# Altium PCB floorctrl_power.PcbDoc
Units mm, origin at the board's own origin, x right, y up, seen from the top; angles counter-clockwise.
Board outline 60 x 60 mm, 2 copper layers (Top Layer, Bottom Layer), stack 1.571 mm thick; 43 components, 44 nets, 131 pads, 0 vias.
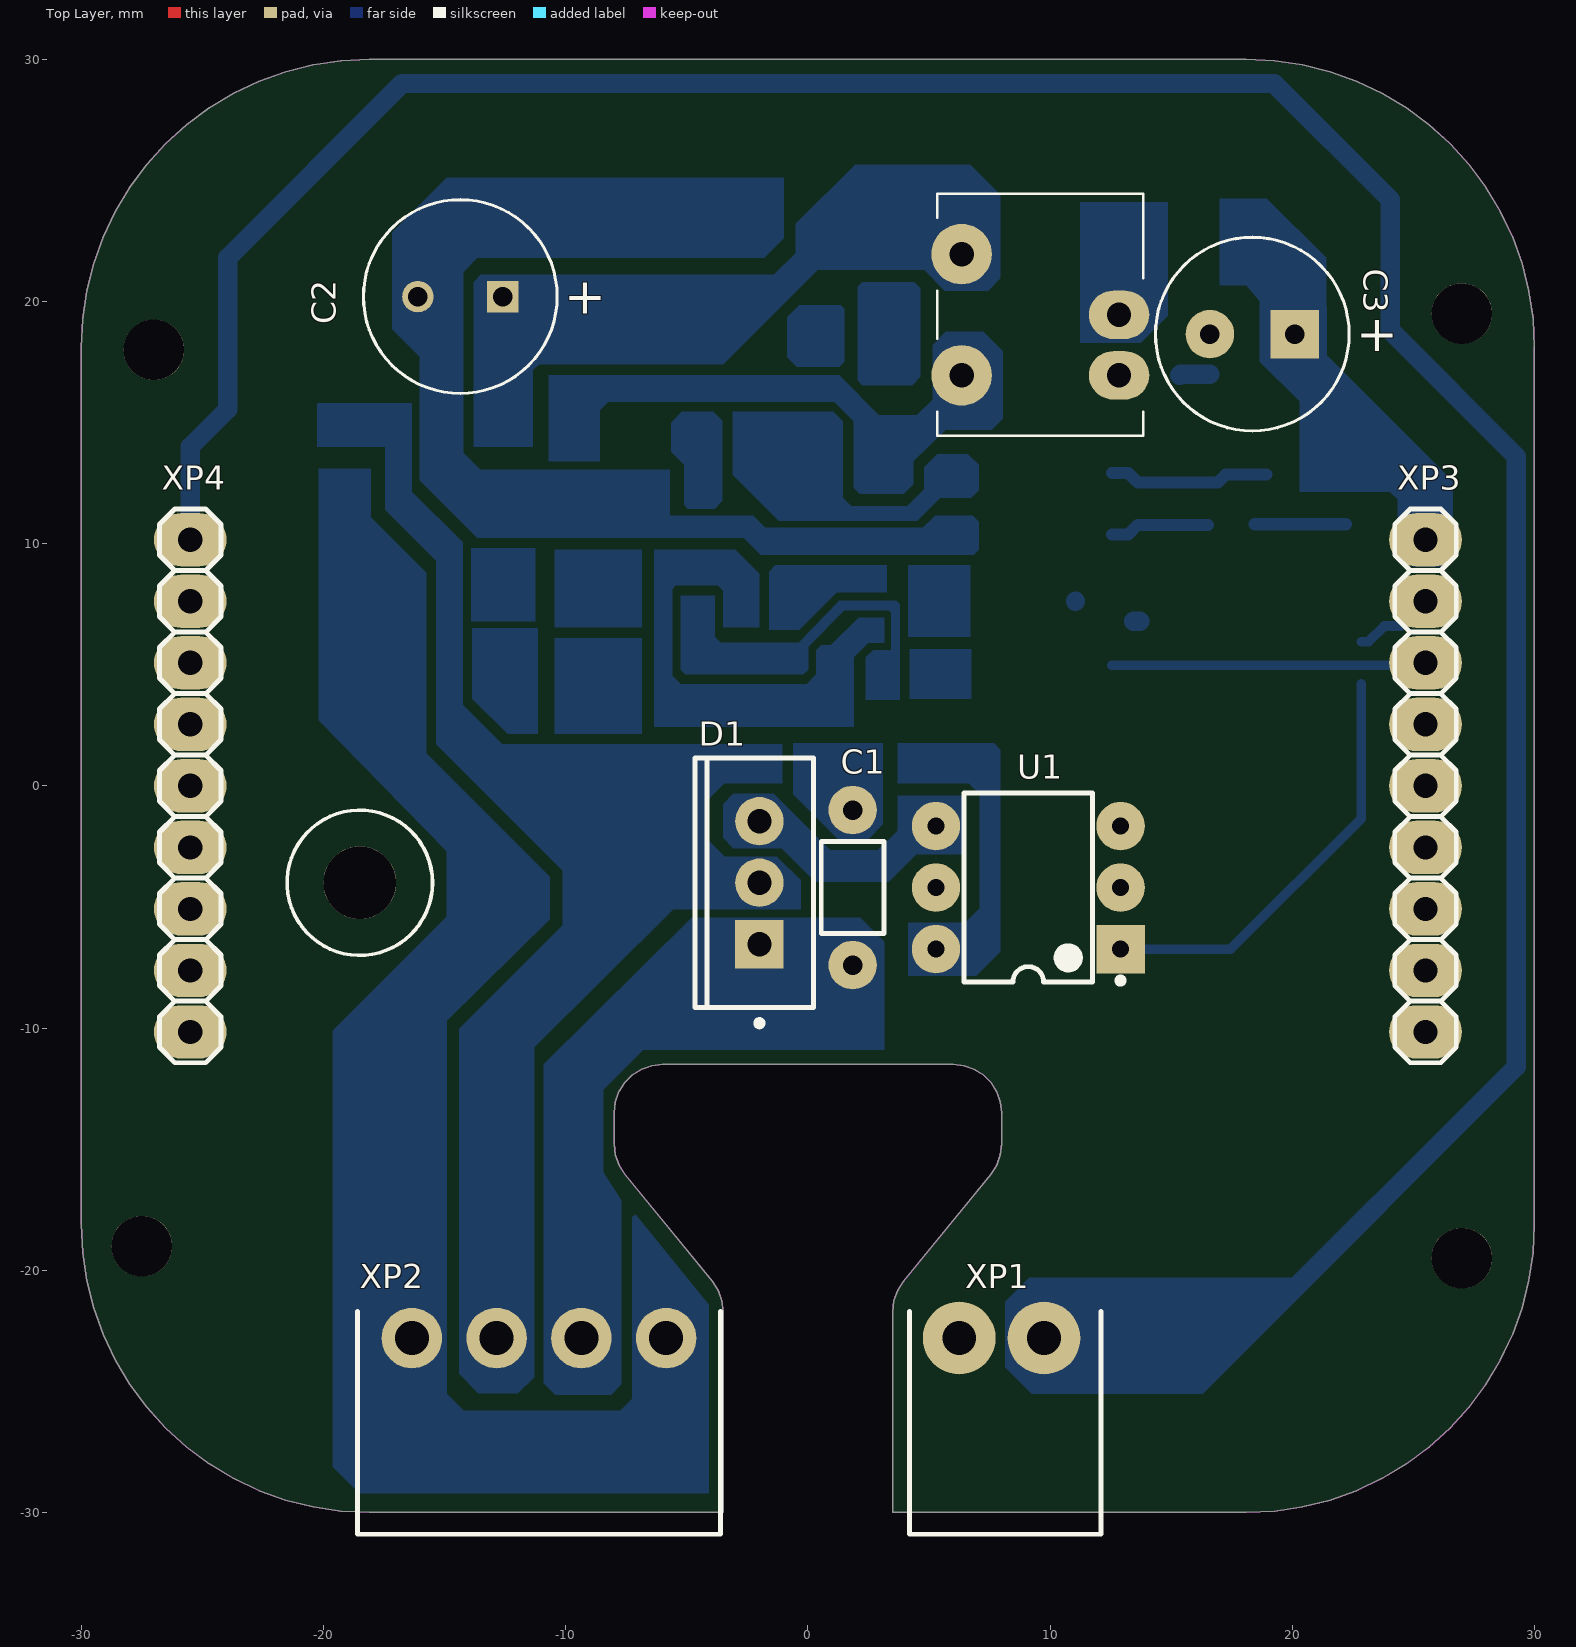
[diagram p0: Top Layer view]
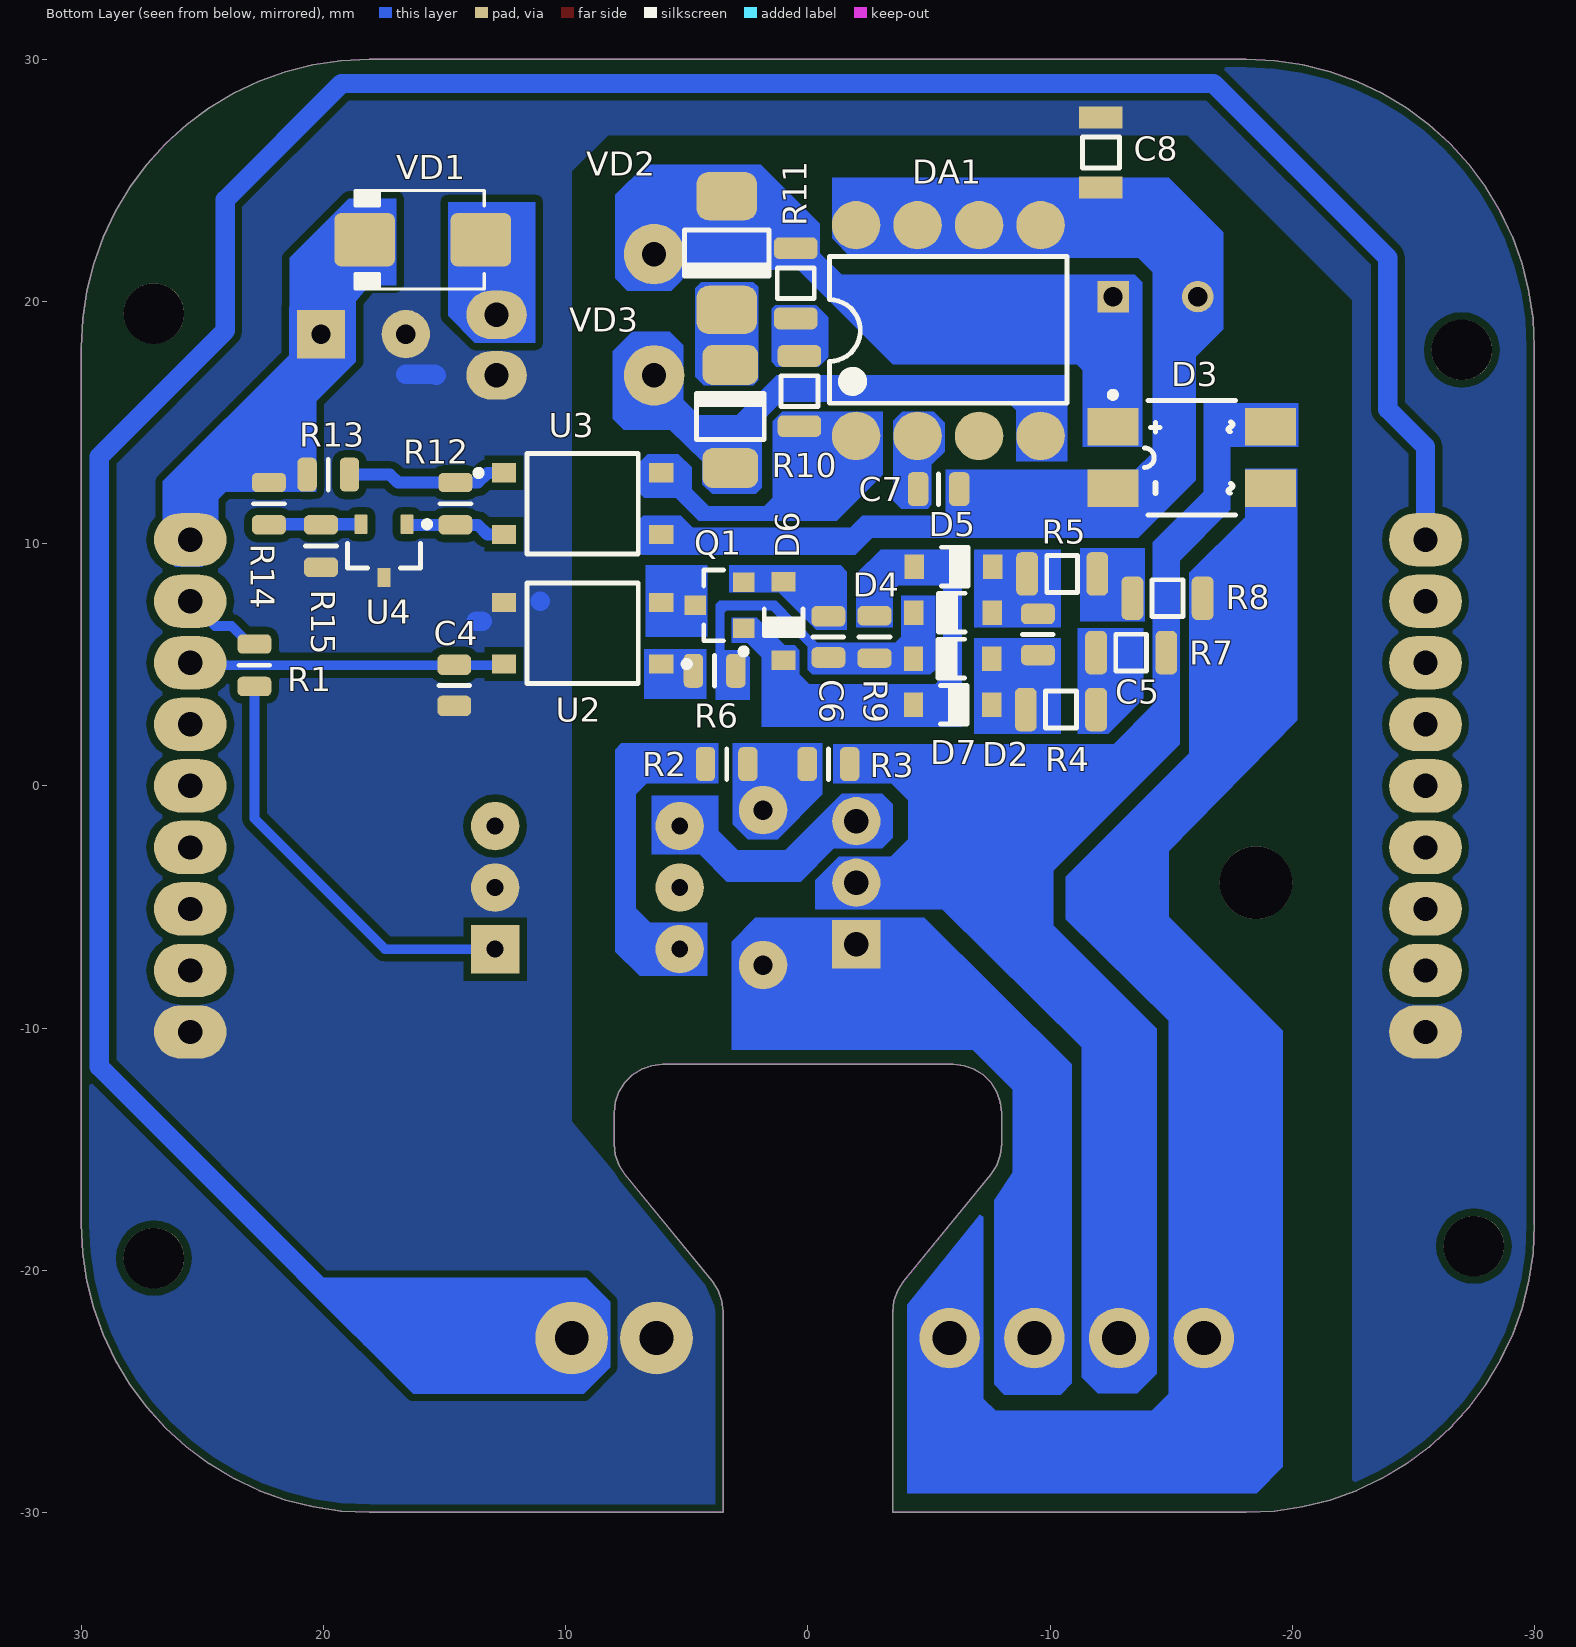
[diagram p1: Bottom Layer view, seen from below]

## Layer stack, top to bottom
Top Solder: solder mask 0.0102, Solder Resist, Dk 3.5
Top Layer: signal copper 0.0356
Dielectric 1: dielectric 1.5, FR-4, Dk 4.8
Bottom Layer: signal copper 0.0356
Bottom Solder: solder mask 0.0102, Solder Resist, Dk 3.5

## Board outline
3.5,-30 3.5,-21.714 3.552,-21.261 3.705,-20.831 3.952,-20.447 7.548,-16.053 7.795,-15.669 7.948,-15.239 8,-14.786 8,-13.5 7.95,-13.055 7.802,-12.632 7.564,-12.253 7.247,-11.936 6.868,-11.698 6.445,-11.55 6,-11.5 -6,-11.5 -6.445,-11.55 -6.868,-11.698 -7.247,-11.936 -7.564,-12.253 -7.802,-12.632 -7.95,-13.055 -8,-13.5 -8,-14.786 -7.948,-15.239 -7.795,-15.669 -7.548,-16.053 -3.952,-20.447 -3.705,-20.831 -3.552,-21.261 -3.5,-21.714 -3.5,-30 -18.107,-30 -19.272,-29.943 -20.427,-29.771 -21.559,-29.488 -22.658,-29.095 -23.713,-28.596 -24.714,-27.996 -25.652,-27.3 -26.517,-26.517 -27.3,-25.652 -27.996,-24.714 -28.596,-23.713 -29.095,-22.658 -29.488,-21.559 -29.771,-20.427 -29.943,-19.272 -30,-18.107 -30,18.107 -29.943,19.272 -29.771,20.427 -29.488,21.559 -29.095,22.658 -28.596,23.713 -27.996,24.714 -27.3,25.652 -26.517,26.516 -25.652,27.3 -24.714,27.996 -23.713,28.596 -22.658,29.095 -21.559,29.488 -20.427,29.771 -19.272,29.943 -18.107,30 18.107,30 19.272,29.943 20.427,29.771 21.559,29.488 22.658,29.095 23.713,28.596 24.714,27.996 25.652,27.3 26.517,26.516 27.3,25.652 27.996,24.714 28.596,23.713 29.095,22.658 29.488,21.559 29.771,20.427 29.943,19.272 30,18.107 30,-18.107 29.943,-19.272 29.771,-20.427 29.488,-21.559 29.095,-22.658 28.596,-23.713 27.996,-24.714 27.3,-25.652 26.517,-26.517 25.652,-27.3 24.714,-27.996 23.713,-28.596 22.658,-29.095 21.559,-29.488 20.427,-29.771 19.272,-29.943 18.107,-30

## Design rules (kind name [scope] priority, off if disabled: settings)
Clearance Clearance_1 [IsRegion] p1: gap=0.3 ignorepadtopadclearanceinfootprint=FALSE
Clearance [All] p2: gap=0.2 ignorepadtopadclearanceinfootprint=FALSE
PlaneConnect [All] p1: planeconnectstyle=Relief reliefexpansion=0.508 reliefentries=4 reliefconductorwidth=0.5 reliefairgap=0.254
PolygonConnect [All] p1: connectstyle=Direct reliefconductorwidth=0.5 reliefentries=4 polygonreliefangle="90 Angle" airgapwidth=0.254
RoutingVias [All] p1: holewidth=0.711 width=1.27 viastyle="Through Hole" minholewidth=0.711 minwidth=1.27 maxholewidth=0.711 maxwidth=1.27
SolderMaskExpansion [All] p1: expansion=0.102
Width [All] p1: maxlimit=2 minlimit=0.2 preferedwidth=0.3
29 further rules are at their usual default settings.

## Components (designator, comment, footprint, x,y, rotation, side; value= is the part's Value field where it differs from the comment)
C1 "A104M15X7RF5TAA" CAPA55-380X260 1.85,-4.2 r90 top
C2 "400 Vdc, 4.7 uF" WCAP-ATG8_8x11.5x3.5#1 -14.35,20.2 r0 top value="4.7 uF"
C3 "10 Vdc, 560 uF" WCAP-ATG8_8x11.5x3.5#2 18.35,18.65 r0 top value="560 uF"
C4 "10nF" CAP0805R 14.6,4.15 r90 bottom
C5 "1nF" CAP0805R -9.5,6.25 r270 bottom
C6 "10uF" CAP0805R -0.85,6.15 r270 bottom
C7 "10uF" CAP0805R -5.4,12.25 r0 bottom
C8 "1nF" CAP1206R -12.1,26.15 r90 bottom
D1 "BTB12-600CW3G" ONSC-TO-220-3-221A-07 -2,-4 r180 top
D2 "1N4148W" JSCJ-SOD-123-2_V -5.98,5.25 r0 bottom
D3 "MB6S" FAIR-MBXS_V -15.85,13.55 r180 bottom
D4 "1N4148W" JSCJ-SOD-123-2_V -6,7.15 r0 bottom
D5 "1N4148W" JSCJ-SOD-123-2_V -6.02,9.05 r180 bottom
D6 "1N4148W" JSCJ-SOD-123-2_V 1,6.8 r270 bottom
D7 "1N4148W" JSCJ-SOD-123-2_V -5.98,3.35 r180 bottom
DA1 "TNY279GN" SMDIP8 -5.8,18.8 r90 bottom
Q1 "BC847BLT3G" ONSC-SOT-23-3-318-08_V 3.65,7.45 r0 bottom
R1 "1k" RES0805R 22.85,4.98 r270 bottom
R2 "330" RES0805R 3.35,0.9 r180 bottom
R3 "330" RES0805R -0.85,0.9 r180 bottom
R4 "220k" RES1206R -10.45,3.15 r0 bottom
R5 "220k" RES1206R -10.5,8.75 r0 bottom
R6 "1k" RES0805R 3.85,4.75 r0 bottom
R7 "220k" RES1206R -13.35,5.5 r0 bottom
R8 "220k" RES1206R -14.85,7.75 r0 bottom
R9 "22k" RES0805R -2.75,6.15 r270 bottom
R10 "2M" RES1206R 0.35,16.3 r270 bottom
R11 "2M" RES1206R 0.5,20.75 r270 bottom
R12 "1k" RES0805R 14.55,11.65 r90 bottom
R13 "33" RES0805R 19.8,12.85 r0 bottom
R14 "10k" RES0805R 22.25,11.65 r270 bottom
R15 "9k1" RES0805R 20.1,9.9 r90 bottom
U1 "MOC3023" LTST-DIP-6 9.1,-4.2 r180 top
U2 "LTV-356T" LTST-LTV-356T-4_V 9.3,6.3 r0 bottom
U3 "LTV-356T" LTST-LTV-356T-4_V 9.3,11.65 r180 bottom
U4 "TL431ACDBZR" DBZ0003A_L 17.5,9.7 r270 bottom
VD1 "10BQ100" DO-214AA 15.9,22.55 r0 bottom
VD2 "SM6T200CA" SMB 3.35,22 r90 bottom
VD3 "US1M" SMA 3.2,15.25 r270 bottom
XP1 "15EDGRC-3,5-02P-1-4" 15EDGRC-3,5-02P-1-4 8,-22.8 r180 top
XP2 "15EDGRC-3.5-04P-14" 15EDGRC-3.5-04P -11.1,-22.8 r180 top
XP3 "PLS" PLS-09 25.5,0 r90 top locked
XP4 "PLS" PLS-09 -25.5,0 r90 top locked

## Footprints (in the part's own frame and the unit in brackets; to place one, negate y for a bottom-side part, rotate by r counter-clockwise, add the part's x,y. Pads: shape width x height; smd on the part's side, far side on the other; paste and mask are expansions set on the pad)
15EDGRC-3,5-02P-1-4 [mm]
  round 3 hole 1.4: 1(1.75,0) 2(-1.75,0)
  silkscreen extent -4.1,-1.1 3.8,8.1, body extent -3.9,-1.2 3.9,8, height 7.22
15EDGRC-3.5-04P [mm]
  round 2.5 hole 1.4: 1(5.25,0) 2(1.75,0) 3(-1.75,0) 4(-5.25,0)
  silkscreen extent -7.5,-1.1 7.5,8.1, body extent -7.4,-1.2 7.4,8, height 7.21
CAP0805R [mm] "capacitor 0805 reflow soldering"
  rrect50% 0.85x1.4 smd: 1(-0.85,0) 2(0.85,0)
  silkscreen extent 0,-0.64 0,0.64, body extent -1,-0.62 1,0.63, height 0.61
CAP1206R [mm] "capacitor 1206 reflow soldering"
  rect 0.9x1.8 smd: 1(-1.45,0) 2(1.45,0)
  silkscreen extent -0.64,-0.76 0.64,0.76, body extent -1.6,-0.8 1.6,0.8, height 0.79
CAPA55-380X260 [mm] "THD, 2-Leads, Dia 2.6mm, Body Length 3.8mm"
  round 2 hole 0.8: 1(-3.2,0) 2(3.2,0)
  silkscreen extent -1.9,-1.3 1.9,1.3, body extent -1.9,-1.29 1.9,1.3, height 2.6
DBZ0003A_L [mm] "SOT23, 3-Leads, Body 3.04x1.4mm, Pitch 0.95mm, IPC High Density"
  rrect18% 0.8x0.55 smd: 1(-1.1,0.95) 2(-1.1,-0.95) 3(1.1,0)
  silkscreen extent -1.22,-1.5 0.7,1.9, body extent -1.26,-1.46 1.26,1.46, height 0.96
DO-214AA [mm] "JEDEC DO214 variation AA. SMB"
  round 0.508 on Mech15: 0(0,0)
  rrect25% 2.5x2.2 smd: A(-2.4,0) K(2.4,0)
  silkscreen extent -2.54,-2.03 2.79,2.03, body extent -2.8,-1.97 2.8,1.98, height 2.62
FAIR-MBXS_V [mm] "SMD, 4-Leads, Body 4.725x3.9mm, Pitch 2.54mm"
  rect 2.1x1.55 smd: 1(-3.25,1.27) 2(-3.25,-1.27) 3(3.25,-1.27) 4(3.25,1.27)
  silkscreen extent -3.38,-2.36 1.8,2.72, body extent -3.37,-2.36 3.37,2.36, height 2.9
JSCJ-SOD-123-2_V [mm] "SMD, 2-Leads, Body 2.7x1.6mm, Height 1.25mm"
  rect 0.8x1 smd: 1(-1.62,0) 2(1.62,0)
  silkscreen extent -0.5,-0.8 0.6,0.8, body extent -1.35,-0.8 1.35,0.8, height 1.25
LTST-DIP-6 [mm] "DIP, 6-Leads, Body 7.8x7mm, Pitch 2.54mm"
  rect 2x2 hole 0.7: 1(-3.81,2.54)
  round 2 hole 0.7: 2(-3.81,0) 3(-3.81,-2.54) 4(3.81,-2.54) 5(3.81,0) 6(3.81,2.54)
  silkscreen extent -3.94,-3.9 2.65,3.96, body extent -3.95,-3.9 3.94,3.9, height 5.37
LTST-LTV-356T-4_V [mm] "SMD, 4-Leads, Body 4.6x4.15mm, Pitch 2.54mm"
  rect 1x0.8 smd: 1(-3.25,1.27) 2(-3.25,-1.27) 3(3.25,-1.27) 4(3.25,1.27)
  silkscreen extent -4.42,-2.07 2.3,2.07, body extent -2.3,-2.07 2.3,2.07, height 2.32
ONSC-SOT-23-3-318-08_V [mm] "SOT23, 3-Leads, Body 2.92x1.3mm, Pitch 0.95mm"
  rect 0.9x0.8 smd: 1(-1,0.95) 2(-1,-0.95) 3(1,0)
  silkscreen extent -1.12,-1.46 0.65,2.02, body extent -0.65,-1.46 0.65,1.46, height 1.11
ONSC-TO-220-3-221A-07 [mm] "FM, 3-Leads, Body 10.3x4.85mm, Pitch 2.54mm"
  rect 2x2 hole 1: 1(0,2.54)
  round 2 hole 1: 2(0,0) 3(0,-2.54)
  silkscreen extent -2.24,-5.15 2.67,5.92, body extent -2.21,-5.15 2.64,5.15, height 19.68
PLS-09 [mm]
  oval 2.2x3 hole 1: 1(-10.16,0) 2(-7.62,0) 3(-5.08,0) 4(-2.54,0) 5(0,0) 6(2.54,0) 7(5.08,0) 8(7.62,0) 9(10.16,0)
  silkscreen extent -11.43,-1.27 11.43,1.27, body extent -11.43,-1.27 11.43,1.27, height 8.45
RES0805R [mm] "resistor 0805 reflow soldering"
  rrect50% 0.8x1.4 smd: 1(-0.875,0) 2(0.875,0)
  silkscreen extent 0,-0.64 0,0.64, body extent -1,-0.62 1,0.63, height 0.61
RES1206R [mm] "resistor 1206 reflow soldering"
  rrect50% 0.9x1.8 smd: 1(-1.45,0) 2(1.45,0)
  silkscreen extent -0.64,-0.76 0.63,0.76, body extent -1.6,-0.8 1.6,0.8, height 0.61
SMA [mm]
  rrect50% 1.65x2.3 smd: A(2.13,0) K(-2.13,0)
  silkscreen extent -0.95,-1.4 0.95,1.4, body extent -2.74,-1.4 2.74,1.4, height 2.3
SMB [mm]
  rrect50% 2x2.5 smd: A(2.35,0) K(-2.35,0)
  silkscreen extent -0.95,-1.75 0.95,1.75, body extent -2.7,-1.8 2.7,1.8, height 2.32
SMDIP8 [mm]
  round 2 smd: 1(-4.35,3.81) 2(-4.35,1.27) 3(-4.35,-1.27) 4(-4.35,-3.81) 5(4.35,-3.81) 6(4.35,-1.27) 7(4.35,1.27) 8(4.35,3.81)
  silkscreen extent -3,-4.9 3.05,4.91, body extent -4.9,-4.93 4.9,4.92, height 4.02
WCAP-ATG8_8x11.5x3.5#1 [mm] "Aluminum Electrolytic Capacitors, 8x11.5mm"
  rect 1.3x1.3 hole 0.8: 1(1.75,0)
  round 1.3 hole 0.8: 2(-1.75,0)
  silkscreen extent -4,-4 4,4, body extent -3.99,-4 4,4, height 11.81
WCAP-ATG8_8x11.5x3.5#2 [mm] "Aluminum Electrolytic Capacitors, 8x11.5mm"
  rect 2x2 hole 0.8: 1(1.75,0)
  round 2 hole 0.8: 2(-1.75,0)
  silkscreen extent -4,-4 4,4, body extent -3.99,-4 4,4, height 11.81

## Part data
C1: library part CMP-2000-05716-1, "Axial Leaded Multilayer Ceramic Capacitor for General Purpose, 50 VDC, 100 nF, +/- 20%, -55 to 125 degC, 2-Pin THD, RoHS, Tape and Reel", Capacitance=0.1µF, Manufacturer=Vishay, Operating Temperature=-55°C~125°C, Package / Case=Axial, Package Description="2-Pin Axial Lead, Dia 2.6 mm, Body Length 3.8 mm", Package Reference=CAPA55-380X260, Ratings=-, Standard Package=7,000, Temperature Coefficient=X7R, Tolerance=±20%, Voltage - Rated=50V, Applications=GeneralPurpose, Category=Capacitors, Datasheet URL=http://www.vishay.com/docs/45164/aseries.pdf, Datasheet Version=08/2013, Family=CeramicCapacitors, Features=-, Height - Seated (Max)=-, Lead Spacing=-, Lead Style=-, Manufacturer URL=http://www.vishay.com/, Mounting Technology=ThroughHole, Mounting Type=ThroughHole, Packaging=Tape&Reel(TR), Series=A, Size / Dimension="0.098\"Diax0.150\"L(2.50mmx3.80mm)", Thickness (Max)=-
C2: library part 860011374005, "WCAP-ATG8 Aluminum Electrolytic Capacitors, 8x11.5mm, 400 Vdc, 4.7 uF", Operating Temperature="-25 °C up to +85 °C", Rated Voltage="400 Vdc", ComponentLink1Description=Manufacturer, ComponentLink1URL=http://www.we-online.de, ComponentLink2Description=Datasheet, ComponentLink2URL=http://katalog.we-online.de/pbs/datasheet/860011374005.pdf, Life Cycle=2000h, Part Number=860011374005, Published Date="Sep. 2017", Publisher="Wurth Elektronik", Size=8x11.5mm
C3: library part 860010274012, "WCAP-ATG8 Aluminum Electrolytic Capacitors, 8x11.5mm, 10 Vdc, 560 uF", Operating Temperature="-40 °C up to +85 °C", Rated Voltage="10 Vdc", ComponentLink1Description=Manufacturer, ComponentLink1URL=http://www.we-online.de, ComponentLink2Description=Datasheet, ComponentLink2URL=http://katalog.we-online.de/pbs/datasheet/860010274012.pdf, Life Cycle=2000h, Part Number=860010274012, Published Date="Sep. 2017", Publisher="Wurth Elektronik", Size=8x11.5mm
C4: library part CC0805_10NF_250V_10%_X7R, Case=0805, Manufacturer=GENERIC, Manufacturer1 ComponentHeight=0.88mm, Manufacturer1 Example=KEMET, Manufacturer1 Part Number=C0805C103KARACTU, Manufacturer Part Number 2=CC0805KKX7RYBB103, Tolerance=±10%, Voltage=250V, Author="I. Kuznetsov", Component Type=Standard, CreateDate=6/24/2013, HelpURL=\\cern.ch\dfs\Applications\Altium\Datasheets\CC0805_X7R_KEMET.pdf, LatestRevisionDate=6/24/2013, Manufacturer Part Number=CC0805_10NF_250V_10%_X7R, Mounted=Yes, Part Description="SMD Multilayer Chip Ceramic Capacitor", Part Number=CC0805_10NF_250V_10%_X7R, Pin Count=2, SMD=Yes, Socket=No, Status=None, Table="Capacitors SMD", TC=X7R
C5: library part CC0805_1NF_50V_10%_X7R, Case=0805, Manufacturer=GENERIC, Manufacturer1 ComponentHeight=1.35mm, Manufacturer1 Example=PHYCOMP, Manufacturer1 Part Number=223858015623, Manufacturer Part Number 2=CC0805KPX7R9BB102, Tolerance=±10%, Voltage=50V, Author="I. Kuznetsov", Component Type=Standard, CreateDate=12/3/2007, HelpURL=\\cern.ch\dfs\Applications\Altium\Datasheets\CC0805_NP0_PHYCOMP.pdf, LatestRevisionDate=12/3/2007, Manufacturer Part Number=CC0805_1NF_50V_10%_X7R, Mounted=Yes, Part Description="SMD Multilayer Chip Ceramic Capacitor", Part Number=CC0805_1NF_50V_10%_X7R, Pin Count=2, SMD=Yes, Socket=No, Status=Preferred, Table="Capacitors SMD", TC=X7R
C6 C7: library part CC0805_10UF_25V_10%_X5R, Case=0805, Manufacturer=GENERIC, Manufacturer1 ComponentHeight=1.4mm, Manufacturer1 Example=TDK, Manufacturer1 Part Number=C2012X5R1E106K125AB, Manufacturer Part Number 2=CC0805KKX5R8BB106, Tolerance=±10%, Voltage=25V, Author="I. Kuznetsov", Component Type=Standard, CreateDate=10/25/2012, HelpURL=\\cern.ch\dfs\Applications\Altium\Datasheets\CC0805_X5R_TDK_C.pdf, LatestRevisionDate=10/25/2012, Manufacturer Part Number=CC0805_10UF_25V_10%_X5R, Mounted=Yes, Part Description="SMD Multilayer Chip Ceramic Capacitor", Part Number=CC0805_10UF_25V_10%_X5R, Pin Count=2, SMD=Yes, Socket=No, Status=Preferred, Table="Capacitors SMD", TC=X5R
C8: library part CC1206_1NF_2KV_10%_X7R, Case=1206, Manufacturer=GENERIC, Manufacturer1 ComponentHeight=1.52mm, Manufacturer1 Example=AVX, Manufacturer1 Part Number=1206GC102KAT1A, Tolerance=±10%, Voltage=2kV, Author="I. Kuznetsov", Component Type=Standard, CreateDate=11/19/2012, HelpURL=\\cern.ch\dfs\Applications\Altium\Datasheets\CC1206_X7R_AVX_HV-MLC.pdf, LatestRevisionDate=11/28/2013, Manufacturer Part Number=CC1206_1NF_2KV_10%_X7R, Mounted=Yes, Part Description="High Voltage MLC Chip Capacitor", Part Number=CC1206_1NF_2KV_10%_X7R, Pin Count=2, SMD=Yes, Socket=No, Status=None, Table="Capacitors SMD", TC=X7R
D1: library part CMP-1070-00036-1, "Triacs, Silicon Bidirectional Thyristor, 3-Pin TO-220, Pb-Free, Tube", Manufacturer="On Semiconductor", ComponentLink1Description="Manufacturer URL", ComponentLink1URL=http://www.onsemi.com/, ComponentLink2Description=Datasheet, ComponentLink2URL=http://www.onsemi.com/pub_link/Collateral/BTB12-600CW3-D.PDF, ComponentLink3Description="Package Specification", ComponentLink3URL=http://www.onsemi.com/pub_link/Collateral/221A-07.PDF, DatasheetVersion="Rev. 1", IGT Max (mA)=35, IT(RMS) Max (A)=12, ITSM Max (A)=120, Mounting Technology="Through Hole", PackageDescription="3-Pin Flange Mount, Vertical Straight Lead, Body 9.97 x 4.445 mm, Pitch 2.54 mm", PackageReference=TO-220-3-221A-07, PackageVersion="Rev. O, 07/2008", Packing=Tube, PartNumber=BTB12-600CW3G, RoHS=Pb-Free
D2 D4 D5 D6 D7: library part CMP-0914-00001-1, "Fast Switching Diode, 75 V, 150 mA, 2-Pin 2.7 x 1.6 x 1.25 mm SMD, Tape and Reel", Manufacturer="Changjiang Electronics", ComponentLink1Description="Manufacturer URL", ComponentLink1URL=http://www.cj-elec.com/, ComponentLink2Description=Datasheet, ComponentLink2URL=http://www.cj-elec.com/txUpfile/20121613352740313.pdf, ComponentLink3Description="Package Specification", ComponentLink3URL=http://www.cj-elec.com/txUpfile/201412112231195145.pdf, DatasheetVersion="Rev. A", IO (mA)=150, IR (uA)=1, Mounting Technology="Surface Mount", PackageDescription="2-Pin SMD, Body 2.7 x 1.6 mm, Height 1.25 mm", PackageReference=SOD-123-2, PackageVersion="Rev. A", Packing="Tape and Reel", PartNumber=1N4148W, PD (mW)=350, Trr (ns)=4, TSTG (degC)="-55 to 150", VF (V)=1.25, VR (V)=75
D3: library part CMP-2000-06669-1, "Bridge Rectifier, 0.5 A, -55 to 150 degC, 4-Pin SMD, RoHS, Tape and Reel", Manufacturer=FairchildSemiconductor, Operating Temperature=-55to150°C, Package=4SOICN, Package Description="4-Pin Surface Mount Device, Body 4.725 x 3.9 mm, Pitch 2.54 mm", Package Reference=MBXS, Peak Average Forward Current=0.5@Ta=50CA, Peak Forward Voltage=1V, Peak Reverse Current=5uA, Peak Reverse Repetitive Voltage=600V, Bridge Type=SinglePhase, Category=BridgeRectifier, Configuration=Single, Datasheet URL=http://www.fairchildsemi.com/datasheets/MB/MB1S.pdf, Datasheet Version="Rev. 1.2.3, 04/2014", Manufacturer URL=https://www.fairchildsemi.com/, Mounting=SurfaceMount, Mounting Technology=SurfaceMount, Packaging=Tape&Reel, Rad Hard=No
Q1: library part CMP-1048-00760-1, "General Purpose Transistor, NPN Silicon, 3-Pin SOT-23, Pb-Free, Tape and Reel", Manufacturer="On Semiconductor", ComponentLink1Description="Manufacturer URL", ComponentLink1URL=http://www.onsemi.com/, ComponentLink2Description=Datasheet, ComponentLink2URL=http://www.onsemi.cn/pub_link/Collateral/BC846ALT1-D.PDF, ComponentLink3Description="Package Specification", ComponentLink3URL=http://www.onsemi.cn/pub_link/Collateral/318-08.PDF, DatasheetVersion="Rev. 11", fT Min (MHz)=100, IC Continuous (A)=0.1, Mounting Technology="Surface Mount", PackageDescription="3-Pin Small Outline Transistor, Body 2.92 x 1.3 mm, Pitch 0.95 mm", PackageReference=SOT-23-3-318-08, PackageVersion="Rev. AP, 11/2009", Packing="Tape and Reel", PartNumber=BC847BLT3G, Polarity=NPN, RoHS=TRUE
R1 R6 R12: library part R0805_1K_1%_0.125W_100PPM, Case=0805, Manufacturer=GENERIC, Manufacturer1 ComponentHeight=0.6mm, Manufacturer1 Example="NIC COMPONENT", Manufacturer1 Part Number=NRC10F1001TRF, Power=0.125W, Tolerance=±1%, Author="CERN DEM JLC", Component Type=Standard, CreateDate=12/3/2007, HelpURL=\\cern.ch\dfs\Applications\Altium\Datasheets\R0805_NIC_NRC.pdf, LatestRevisionDate=3/13/2008, Manufacturer Part Number=R0805_1K_1%_0.125W_100PPM, Mounted=Yes, PackageDescription=Standard, Part Description="General Purpose Thick Film Chip Resistor", Part Number=R0805_1K_1%_0.125W_100PPM, Pin Count=2, SMD=Yes, Socket=No, Status=Preferred, Table="Resistors SMD", TC=±100ppm/°C
R2 R3: library part R0805_330R_1%_0.125W_100PPM, Case=0805, Manufacturer=GENERIC, Manufacturer1 ComponentHeight=0.6mm, Manufacturer1 Example="NIC COMPONENT", Manufacturer1 Part Number=NRC10F3300TRF, Power=0.125W, Tolerance=±1%, Author="CERN DEM JLC", Component Type=Standard, CreateDate=12/3/2007, HelpURL=\\cern.ch\dfs\Applications\Altium\Datasheets\R0805_NIC_NRC.pdf, LatestRevisionDate=3/13/2008, Manufacturer Part Number=R0805_330R_1%_0.125W_100PPM, Mounted=Yes, PackageDescription=Standard, Part Description="General Purpose Thick Film Chip Resistor", Part Number=R0805_330R_1%_0.125W_100PPM, Pin Count=2, SMD=Yes, Socket=No, Status=Preferred, Table="Resistors SMD", TC=±100ppm/°C
R4 R5 R7 R8: library part R1206_220K_1%_0.25W_100PPM, Case=1206, Manufacturer=GENERIC, Manufacturer1 ComponentHeight=0.65mm, Manufacturer1 Example="NIC COMPONENT", Manufacturer1 Part Number=NRC12F2203TRF, Power=0.25W, Tolerance=±1%, Author="CERN DEM JLC", Component Type=Standard, CreateDate=12/3/2007, HelpURL=\\cern.ch\dfs\Applications\Altium\Datasheets\R1206_NIC_NRC.pdf, LatestRevisionDate=3/13/2008, Manufacturer Part Number=R1206_220K_1%_0.25W_100PPM, Mounted=Yes, PackageDescription=Standard, Part Description="General Purpose Thick Film Chip Resistor", Part Number=R1206_220K_1%_0.25W_100PPM, Pin Count=2, SMD=Yes, Socket=No, Status=Preferred, Table="Resistors SMD", TC=±100ppm/°C
R9: library part R0805_22K_1%_0.125W_100PPM, Case=0805, Manufacturer=GENERIC, Manufacturer1 ComponentHeight=0.6mm, Manufacturer1 Example="NIC COMPONENT", Manufacturer1 Part Number=NRC10F2202TRF, Power=0.125W, Tolerance=±1%, Author="CERN DEM JLC", Component Type=Standard, CreateDate=12/3/2007, HelpURL=\\cern.ch\dfs\Applications\Altium\Datasheets\R0805_NIC_NRC.pdf, LatestRevisionDate=3/13/2008, Manufacturer Part Number=R0805_22K_1%_0.125W_100PPM, Mounted=Yes, PackageDescription=Standard, Part Description="General Purpose Thick Film Chip Resistor", Part Number=R0805_22K_1%_0.125W_100PPM, Pin Count=2, SMD=Yes, Socket=No, Status=Preferred, Table="Resistors SMD", TC=±100ppm/°C
R10 R11: library part R1206_2M_1%_0.25W_100PPM, Case=1206, Manufacturer=GENERIC, Manufacturer1 ComponentHeight=0.65mm, Manufacturer1 Example="NIC COMPONENT", Manufacturer1 Part Number=NRC12F2004TRF, Power=0.25W, Tolerance=±1%, Author="CERN DEM JLC", Component Type=Standard, CreateDate=12/3/2007, HelpURL=\\cern.ch\dfs\Applications\Altium\Datasheets\R1206_NIC_NRC.pdf, LatestRevisionDate=3/13/2008, Manufacturer Part Number=R1206_2M_1%_0.25W_100PPM, Mounted=Yes, PackageDescription=Standard, Part Description="General Purpose Thick Film Chip Resistor", Part Number=R1206_2M_1%_0.25W_100PPM, Pin Count=2, SMD=Yes, Socket=No, Status=Preferred, Table="Resistors SMD", TC=±100ppm/°C
R13: library part R0805_33R_1%_0.125W_100PPM, Case=0805, Manufacturer=GENERIC, Manufacturer1 ComponentHeight=0.6mm, Manufacturer1 Example="NIC COMPONENT", Manufacturer1 Part Number=NRC10F33R0TRF, Power=0.125W, Tolerance=±1%, Author="CERN DEM JLC", Component Type=Standard, CreateDate=12/3/2007, HelpURL=\\cern.ch\dfs\Applications\Altium\Datasheets\R0805_NIC_NRC.pdf, LatestRevisionDate=3/13/2008, Manufacturer Part Number=R0805_33R_1%_0.125W_100PPM, Mounted=Yes, PackageDescription=Standard, Part Description="General Purpose Thick Film Chip Resistor", Part Number=R0805_33R_1%_0.125W_100PPM, Pin Count=2, SMD=Yes, Socket=No, Status=Preferred, Table="Resistors SMD", TC=±100ppm/°C
R14: library part R0805_10K_1%_0.125W_100PPM, Case=0805, Manufacturer=GENERIC, Manufacturer1 ComponentHeight=0.6mm, Manufacturer1 Example="NIC COMPONENT", Manufacturer1 Part Number=NRC10F1002TRF, Power=0.125W, Tolerance=±1%, Author="CERN DEM JLC", Component Type=Standard, CreateDate=12/3/2007, HelpURL=\\cern.ch\dfs\Applications\Altium\Datasheets\R0805_NIC_NRC.pdf, LatestRevisionDate=3/13/2008, Manufacturer Part Number=R0805_10K_1%_0.125W_100PPM, Mounted=Yes, PackageDescription=Standard, Part Description="General Purpose Thick Film Chip Resistor", Part Number=R0805_10K_1%_0.125W_100PPM, Pin Count=2, SMD=Yes, Socket=No, Status=Preferred, Table="Resistors SMD", TC=±100ppm/°C
R15: library part R0805_9K1_1%_0.125W_100PPM, Case=0805, Manufacturer=GENERIC, Manufacturer1 ComponentHeight=0.6mm, Manufacturer1 Example="NIC COMPONENT", Manufacturer1 Part Number=NRC10F9101TRF, Power=0.125W, Tolerance=±1%, Author="CERN DEM JLC", Component Type=Standard, CreateDate=12/3/2007, HelpURL=\\cern.ch\dfs\Applications\Altium\Datasheets\R0805_NIC_NRC.pdf, LatestRevisionDate=3/13/2008, Manufacturer Part Number=R0805_9K1_1%_0.125W_100PPM, Mounted=Yes, PackageDescription=Standard, Part Description="General Purpose Thick Film Chip Resistor", Part Number=R0805_9K1_1%_0.125W_100PPM, Pin Count=2, SMD=Yes, Socket=No, Status=Preferred, Table="Resistors SMD", TC=±100ppm/°C
U1: library part CMP-2000-06746-1, "Optocoupler Triac, 50 mA, -40 to 100 degC, 6-Pin DIP, RoHS, Tube", Current - DC Forward (If) (Max)=50mA, Current - Hold (Ih)=400µA(Typ), Current - LED Trigger (Ift) (Max)=5mA, Current - On State (It (RMS)) (Max)=-, Manufacturer=Lite-On-Inc., Operating Temperature=-40°C~100°C, Package / Case="6-DIP(0.300\",7.62mm)", Package Description="6-Pin Double In-line Package, Body 7.3 x 6.5 mm, Pitch 2.54 mm", Package Reference=DIP-6, Supplier Device Package=6-DIP, Voltage - Forward (Vf) (Typ)=1.2V, Voltage - Isolation=5000Vrms, Voltage - Off State=600V, Approvals=CSA,FIMKO,UL, Category=Isolators, Datasheet URL=http://optoelectronics.liteon.com/upload/download/DS70-2001-026/S_110_MOC3063%20SERIES.pdf, Datasheet Version="Rev. C, 04/2010", Family=Optoisolators-Triac,SCROutput, Manufacturer URL=http://www.us.liteon.com/, Mounting Technology=ThroughHole, Mounting Type=ThroughHole, Number of Channels=1, Output Type=Triac, Packaging=Tube, Series=-, Static dV/dt (Min)=1kV/µs, Turn On Time=-, Zero Crossing Circuit=Yes
U2 U3: library part CMP-2000-05202-1, "Optocoupler DC-IN 1-CH Transistor DC-OUT 4-Pin Mini-Flat", Manufacturer=Lite-On, Maximum Collector Current=50mA, Maximum Collector Emitter Saturation Voltage=200mV, Maximum Collector Emitter Voltage=80V, Maximum Current Transfer Ratio=600%, Maximum Forward Voltage=1.4V, Maximum Operating Temperature=100C, Maximum Power Dissipation=170mW, Maximum Reverse Voltage=6V, Minimum Current Transfer Ratio=50%, Minimum Isolation Voltage=3750Vrms, Minimum Operating Temperature=-55C, Supplier_Package=(Min)i-Flat, Typical Forward Voltage=1.2V, Datasheet URL=https://datasheet.ciiva.com/16216/ltv-356t-16216247.pdf, Datasheet Version=May-09, Family=LTV-356T, Input Type=DC, Manufacturer URL=http://www.us.liteon.com/, Maximum Fall Time=18us, Maximum Input Current=50mA, Maximum Rise Time=18us, Mounting=SurfaceMount, Number of Channels per Chip=1, Output Device=Transistor, Output Type=DC, Pin_Count=4, Product Height=2mm, Product Length=3.6mm, Product Type=TransistorandPhotovoltaicOutputPhotoCouplers, Product Width=4.4mm, Typical Fall Time=3us, Typical Rise Time=4us
U4: library part CMP-0366-01028-2, "Adjustable Precision Shunt Regulator, 34 ppm / degC, 100 mA, 0 to 70 degC, 3-pin SOT-23 (DBZ), Green (RoHS & no Sb/Br)", Manufacturer="Texas Instruments", Rating=Catalog, Temp Coeff(Typ)(ppm/ degree C)=34, Code_JEDEC=TO-236, ComponentLink1Description="Manufacturer URL", ComponentLink1URL=http://www.ti.com/, ComponentLink2Description=Datasheet, ComponentLink2URL=http://www.ti.com/general/docs/lit/getliterature.tsp?genericPartNumber=TL431A&fileType=pdf, ComponentLink3Description="Package Specification", ComponentLink3URL=http://www.ti.com/litv/pdf/mpds108a, DatasheetVersion=SLVS543M, Eco-Plan="Green (RoHS & no Sb/Br)", Initial Accuracy @ 25/deg C(%)=1, Iout/Iz(Max)(mA)=100, Min Iz for Regulation(uA)=600, Mounting Technology="Surface Mount", PackageDescription="3-Pin Plastic Small Outline, Body 2.92 x 1.3 mm, Pitch 0.95 mm", PackageReference=DBZ0003A, PackageVersion=4203227/B, PartNumber=TL431ACDBZR, SubFamily="Shunt Voltage Reference", VO Adj(Max)(V)=36, VO Adj(Min)(V)=2.495
XP2: library part 15EDGRC-3.65-04P-14, Case=15EDGRC-3.5-04P-14, ComponentLink1URL=http://files.xn--e1agecchai.xn--p1ai/pdf/15edgrc-3.5.pdf, Component Type=Standard, Device=15EDGRC-3.5-04P-14, Family=15EDGRC, Mounted=Yes, Part Number=15EDGRC-3.65-04P-14, Pin Count=4, SMD=No, Socket=No, Status=Active, Table=DEGSON
XP3 XP4: library part PLS-09, Manufacturer=AUK, ComponentLink1URL=http://lib.chipdip.ru/227/DOC000227157.pdf, Component Type=Standard, Device=PLS-09, Family=PLS, Manufacturer Part Number=PLS-09, PackageDescription=PLS-09, Part Number=PLS-09, Pin Count=9, SMD=Yes, Table=AUK
DA1: Device=TNY279GN, Part Number=TNY279GN, Table=Power
VD1: Device=10BQ100, Part Number=10BQ100, Table=Diode
VD2: Device=SM6T200CA, Part Number=SM6T200CA, Table=Diode
VD3: Device=US1M, Part Number=US1M, Table=Diode
XP1: Case=15EDGRC-3,5-02P-1-4, ComponentLink1URL=http://files.xn--e1agecchai.xn--p1ai/pdf/15edgrc-3.5.pdf, Component Type=Standard, Device=15EDGRC-3,5-02P-1-4, Family=15EDGRC, Mounted=Yes, Part Number=15EDGRC-3,5-02P-1-4, Pin Count=2, SMD=No, Socket=No, Status=Active, Table=DEGSON

## Free pads (board coordinates)
  oval 2.5x2 hole 1: 5V(12.85,19.45) GND(12.85,16.95)
  round 2.5 hole 2.5: 8(-27,18) 9(-27.5,-19) 10(27,-19.5) 11(27,19.5)
  round 3 hole 3: 12(-18.5,-4)
  round 2.5 hole 1: DRAIN(6.35,16.95) HV(6.35,21.95)

## Nets (pads, with @x,y where several pads share a name; then routed paths per layer and width w, separated by ;. In a path a pad name is that pad's centre, name@x,y a point inside that pad or via, vN(x,y) a via of type N, cw(c..) or ccw(c..) an arc to the next point about the centre after c; other vN are vias at no path point)
2V8: XP4.8
5V: pad.5V VD1.A
5V1: C3.1 R13.2 R14.1 VD1.K XP3.9
AC1: D1.2 D3.4 R3.2 R7.1 XP2.2
AC2: D3.3 R8.1 XP2.1 XP2.4
BP/M: C7.2 DA1.2 | length 2.1
  Bottom Layer w0.8: C7.2@-4.55,12.35 -4.53,12.37 DA1.2
DRAIN: DA1.4 pad.DRAIN VD3.A
EN/UV: DA1.1 R10.2 U3.4 | length 2.5
  Bottom Layer w0.8: DA1.1 0.05,14.45 R10.2@0.35,14.75
GND: C3.2 C4.1 C8.2 pad.GND R15.1 U1.2 U2.3 U4.3 XP1.1 XP3.1 XP4.1 | length 1.5
  Bottom Layer w0.8: 13.45,6.8 13.7,6.8 ; 15.35,16.95 15.4,17 16.6,17
HGND: C2.2 C7.1 C8.1 D3.2 DA1.5 DA1.6 DA1.7 DA1.8 U3.3 | length 15.2
  Bottom Layer w0.8: -15.35,13.25 -14.38,12.28 D3.2 ; -13.95,23.15 DA1.5 DA1.6 DA1.7 DA1.8 ; C7.1@-6.32,12.28 C7.1@-6.25,12.35
HTR1: C1.1 D1.1 XP2.3 | length 0.2
  Bottom Layer w0.8: D1.1@-2.04,-7.19 D1.1@-1.93,-7.3
HV: C2.1 D3.1 pad.HV R11.1 VD2.A | length 12.4
  Bottom Layer w0.8: -13.4,20.2 -1.8,20.2 ; VD2.A@3.4,24.15 VD2.A@4.15,24.15
NetC1_2: C1.2 R2.2 R3.1 | length 3.8
  Bottom Layer w0.8: R3.1@-0.115,1.05 -0.065,1 1.735,1 1.735,-0.875 C1.2@1.76,-0.9
NetC5_1: C5.1 D4.1 D5.2 R5.2
NetC5_2: C5.2 D2.1 D7.2 R4.2
NetC6_1: C6.1 D6.1 Q1.2 | length 4.7
  Bottom Layer w0.5: C6.1 -0.85,8 -0.45,8.4 Q1.2
NetC6_2: C6.2 D2.2 D4.2 R6.1 R9.2 | length 6
  Bottom Layer w0.5: D4.2 -4.38,5.27 D2.2 -0.9,5.25 C6.2 C6.2@-0.55,5.3 ; R6.1 R6.1@2.975,5.025
NetD1_3: D1.3 U1.4
NetD5_1: D5.1 D6.2 D7.1 Q1.1 R9.1 | length 12
  Bottom Layer w0.5: -5.9,4.89 -5.9,8.3 -5.15,9.05 D5.1 -3.3,9.05 ; D7.1 -0.83,3.35 ; D6.2 1.33,5.18 Q1.1
NetQ1_3: Q1.3 U2.2 | length 1.5
  Bottom Layer w0.5: Q1.3 4.72,7.52 U2.2@6.1,7.52
NetR1_2: R1.2 U1.1 | length 17.7
  Bottom Layer w0.4: U1.1 17.46,-6.74 22.85,-1.35 R1.2 R1.2@22.85,4.205
NetR2_1: R2.1 U1.6
NetR4_1: R4.1 R7.2
NetR5_1: R5.1 R8.2
NetR6_2: R6.2 U2.1 | length 1.5
  Bottom Layer w0.5: R6.2 4.955,4.98 U2.1@6.1,4.98
NetR10_1: R10.1 R11.2
NetR12_1: R12.1 U3.2 U4.1 | length 4.2
  Bottom Layer w0.3: U4.1@16.525,10.775 U4.1
  Bottom Layer w0.5: U3.2 13.23,10.38 13.625,10.775 R12.1 U4.1@16.525,10.775
NetR12_2: R12.2 R13.1 U3.1 | length 6.7
  Bottom Layer w0.5: U3.1 13.23,12.92 13.625,12.525 R12.2 16.925,12.525 17.25,12.85 R13.1
NetR14_2: R14.2 R15.2 U4.2 | length 3.8
  Bottom Layer w0.3: R14.2@22.225,10.8 R14.2
  Bottom Layer w0.5: U4.2 R14.2@22.225,10.8
NetVD2_K: VD2.K VD3.K
ONEWIRE: XP1.2 XP4.9 | length 127.2
  Bottom Layer w0.8: XP4.9 -25.5,14 -23.95,15.55 -23.95,21.8 -16.75,29 19.25,29 24.05,24.2 24.05,18.8 29.25,13.6 29.25,-11.6 18.05,-22.8 XP1.2@9.9,-22.8
PA10: XP3.6
PA11: XP3.5
PA12: XP3.4
PB4: XP4.2
PB5: XP4.3
PB6: XP4.4
PB7: XP4.5
PF0: XP4.6
PF1: XP4.7
SWCK: XP3.2
SWDAT: XP3.3
TRI_OUT: R1.1 XP3.8 | length 3.3
  Bottom Layer w0.4: R1.1@22.85,5.955 23.155,5.955 23.8,6.6 24.48,6.6 XP3.8
ZC_IN: C4.2 U2.4 XP3.7 | length 13.3
  Bottom Layer w0.4: U2.4@12.55,4.98 14.6,4.98 XP3.7@25.5,4.98 ; XP3.7@25.28,5.3 XP3.7
pads on no net: DA1.3 U1.3 U1.5 VD1.0

## Polygon pours and split planes (outlines as drawn)
GND on Bottom Layer "Bottom Layer-GND" (solid, remove dead copper, pour order 0): -31.25,30.85 30.65,30.85 30.65,-30.85 -31.25,-30.85

## Keep-outs
Keep-Out Layer:
  the board outline again, w0.05

## Other copper
Top Layer:
  region: 12.05,13.35
Bottom Layer:
  region net ONEWIRE: 9.15,-20.3 8.15,-21.3 8.15,-24 9.25,-25.1 16.3,-25.1 21.1,-20.3
  region net NetVD2_K: 2.05,20.6 2.25,20.8 4.4,20.8 4.65,20.55 4.65,16.9 4.3,16.55 2.25,16.55 2.05,16.75
  region net NetR10_1: 1.35,19.85 1.5,19.7 1.5,17.5 1.3,17.3 -0.45,17.3 -0.85,17.7 -0.85,19.35 -0.35,19.85
  region net NetR4_1: -13.85,6.5 -11.15,6.5 -11.15,2.15 -12.4,2.15 -13.85,3.6
  region net NetR5_1: -11.25,9.8 -11.25,6.8 -13.9,6.8 -13.9,9.8
  region net NetC5_2: -10.45,6.1 -6.868,6.1 -6.868,2.15 -10.45,2.15
  region net NetC5_1: -6.868,9.75 -6.868,6.55 -10.45,6.55 -10.45,9.75
  region net AC2: -20.2,13.1 -18.05,13.1 -18.05,11.1 -15.75,8.8 -15.75,1.35 -10.65,-3.75 -10.65,-5.5 -14.9,-9.701 -14.9,-25.1 -14.2,-25.8 -7.75,-25.8 -7.247,-25.297 -7.247,-17.8 -7.1,-17.7 -4.1,-21.415 -4.1,-29.2 -18.53,-29.2 -19.612,-28.117 -19.612,-10.112 -14.9,-5.4 -14.9,-2.7 -20.2,2.7
  region net BP/M: -5.2,15.45 -5.65,15 -5.65,13.8 -5.1,13.25 -5.1,11.6 -4.95,11.45 -3.85,11.45 -3.528,11.772 -3.526,15.076 -3.9,15.45
  region net AC1: -0.3,-5.1 -5.55,-5.1 -11.3,-10.8 -11.3,-24.414 -11.968,-25.082 -13.6,-25.082 -14.4,-24.282 -14.4,-10.02 -10.13,-5.75 -10.13,-3.5 -15.35,1.72 -15.35,9.3 -17.45,11.4 -17.45,14.009 -20.25,14.009 -20.25,15.8 -16.35,15.8 -16.35,12.15 -14.25,10.05 -14.25,3.35 -12.62,1.72 -1.05,1.72 -1.05,0.1 -3.45,0.1 -4.15,-0.6 -4.15,-2.2 -3.426,-2.924 -1.276,-2.924 -0.3,-3.9
  region net HGND: -1,25.1 -14.9,25.1 -17.15,22.85 -17.15,18.85 -16.025,17.725 -16.025,12.625 -13.65,10.25 -2.65,10.25 -1.95,9.55 6.85,9.55 7.05,9.75 7.05,10.9 6.8,11.15 5.25,11.15 4.75,10.65 -1.75,10.65 -2.25,11.15 -5.7,11.15 -5.7,13.05 -13.525,13.05 -14.237,13.763 -14.237,21.213 -13.65,21.8 -1.8,21.8 -1,22.6
  region net EN/UV: -3.1,15.45 1.05,15.45 1.45,15.05 1.45,11.9 1.8,11.55 4.1,11.55 4.8,12.25 4.8,13.15 5.35,13.7 6.6,13.7 7.05,13.25 7.05,12.2 6.75,11.9 5.463,11.9 4.513,10.95 -1.2,10.95 -3.1,12.85
  region net HV: -11.35,14 -11.35,17.15 -11.1,17.4 -3.5,17.4 0.4,21.3 4.8,21.3 5.65,20.45 7.45,20.45 7.95,20.95 7.95,24.4 6.7,25.65 1.95,25.65 -0.5,23.2 -0.5,22 -1.4,21.1 -13.5,21.1 -13.8,20.8 -13.8,14
  region net DRAIN: -10.7,13.4 -8.6,13.4 -8.6,15.5 -8.25,15.85 1.1,15.85 1.9,15.05 1.9,12.3 2.15,12.05 3.952,12.05 4.351,12.449 4.351,13.4 5.7,14.7 7.6,14.7 8.05,15.15 8.05,17.95 7.25,18.75 5.7,18.75 5.15,18.2 5.15,15.95 4.5,15.3 2.937,15.3 1.293,16.943 -10.7,16.943
  region net NetD1_3: -3.075,-0.325 -3.5,-0.75 -3.5,-2.15 -3.075,-2.575 -1.075,-2.575 0.3,-3.95 3.341,-3.95 4.466,-2.825 6.445,-2.825 6.445,-0.4 3.705,-0.4 3.705,-1.858 2.885,-2.65 0.925,-2.65 -1.4,-0.325
  region net NetR6_2: 4.2,5.65 4.2,3.6 6.75,3.6 6.75,5.65
  region net NetQ1_3: 4.15,9.1 4.15,6.15 6.7,6.15 6.7,9.1
  region net NetC6_1: 3.25,9.1 -1.35,9.1 -1.6,8.85 -1.6,6.45 -0.35,6.45 1.2,8 3.25,8
  region net NetC1_2: -0.6,1.75 3.1,1.75 3.1,-1.589 2.489,-2.2 1.25,-2.2 -0.6,-0.35
  region net NetR2_1: 3.705,1.75 7.7,1.75 7.95,1.5 7.95,-6.85 6.95,-7.85 4.15,-7.85 4.15,-5.65 6.5,-5.65 7.1,-5.05 7.1,-0.35 6.65,0.1 3.705,0.1
  pour cut-out: 8.25,26.864 9.748,25.366 9.748,-13.852 4.3,-20.427 -1.1,-33.15 -22.477,-33.148 -22.477,20.05 -15.664,26.864
  region net NetC6_2: -5.25,7.85 -3.85,7.85 -3.85,6.15 -3.6,5.9 -0.379,5.9 1.3,7.65 3.65,7.65 3.8,7.5 3.8,3.55 2.4,3.55 2.4,5.3 2.7,5.6 3.45,5.6 3.45,7.15 3.35,7.25 1.507,7.25 0.007,5.75 0.007,4.793 -0.182,4.605 -5.062,4.605 -5.25,4.793
  region net NetD5_1: -3.5,6.552 -3.5,8.05 -3.725,8.275 -5.45,8.275 -5.6,8.125 -5.6,4.55 -5.25,4.2 -0.05,4.2 0.35,4.6 0.35,5.6 0.55,5.8 0.95,5.8 2.1,6.95 3.15,6.95 3.15,5.9 2.5,5.9 1.9,5.3 1.9,2.45 -6.35,2.45 -6.35,8.65 -6.35,9.75 -3,9.75 -2.002,8.752 -2.002,6.552
  region net 5V1: 17,24.25 17,20.675 18.107,20.675 18.662,20 18.662,17.512 20.3,15.875 20.3,12.15 23.25,12.15 24.034,12.141 24.35,11.825 24.35,9.7 25,9.05 26.125,9.05 26.625,9.55 26.625,12.575 21.416,17.784 21.4,21.8 18.95,24.25
  region net 5V: 11.25,24.1 11.25,18.3 13.75,18.3 14.85,19.4 14.85,22.9 14.85,24.1
  region net HTR1: 2.168,-5.45 -4.8,-5.45 -10.9,-11.5 -10.9,-24.664 -10.432,-25.132 -8.118,-25.132 -7.7,-24.714 -7.7,-17.113 -8.452,-15.947 -8.452,-12.552 -6.804,-10.904 3.15,-10.904 3.15,-6.432

## Silkscreen, mask and mechanical layers (free items; w line width, h text height)
Top Overlay:
  circle w0.15: c-18.5,-4 r3
  lines w0.1: 5.35,15.45 5.35,14.45 13.85,14.45 13.85,15.45 ; 5.35,18.45 5.35,20.45 ; 5.35,23.45 5.35,24.45 13.85,24.45 13.85,20.95

## Text inside footprints (layer, text, board x,y; h text height)
C2: Top Overlay "+" at -10.05,19.5 h1.5
C3: Top Overlay "+" at 22.65,17.95 h1.5